# Altium PCB InterfaceOld.PcbDoc
Units mil, origin at the board's own origin, x right, y up, seen from the top; angles counter-clockwise.
Board outline 9900.03 x 4930.03 mil, 2 copper layers (Top Layer, Bottom Layer); 34 components, 85 nets, 292 pads, 55 vias.
Unrouted connection lines stored in the file: 116.
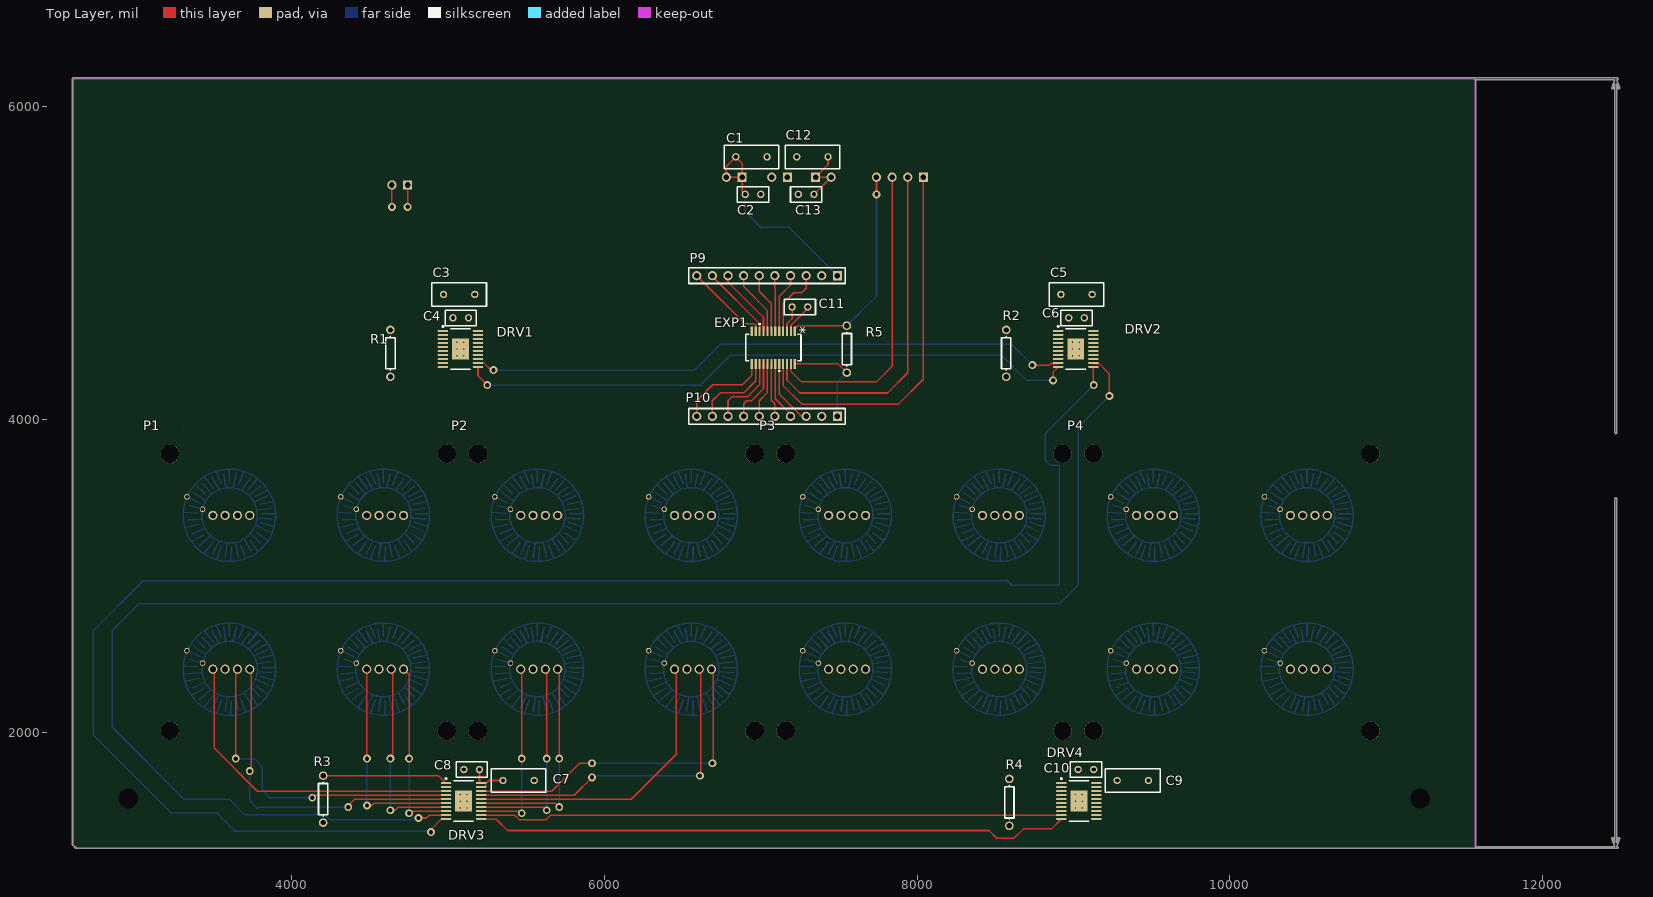
[diagram p0: Top Layer view]
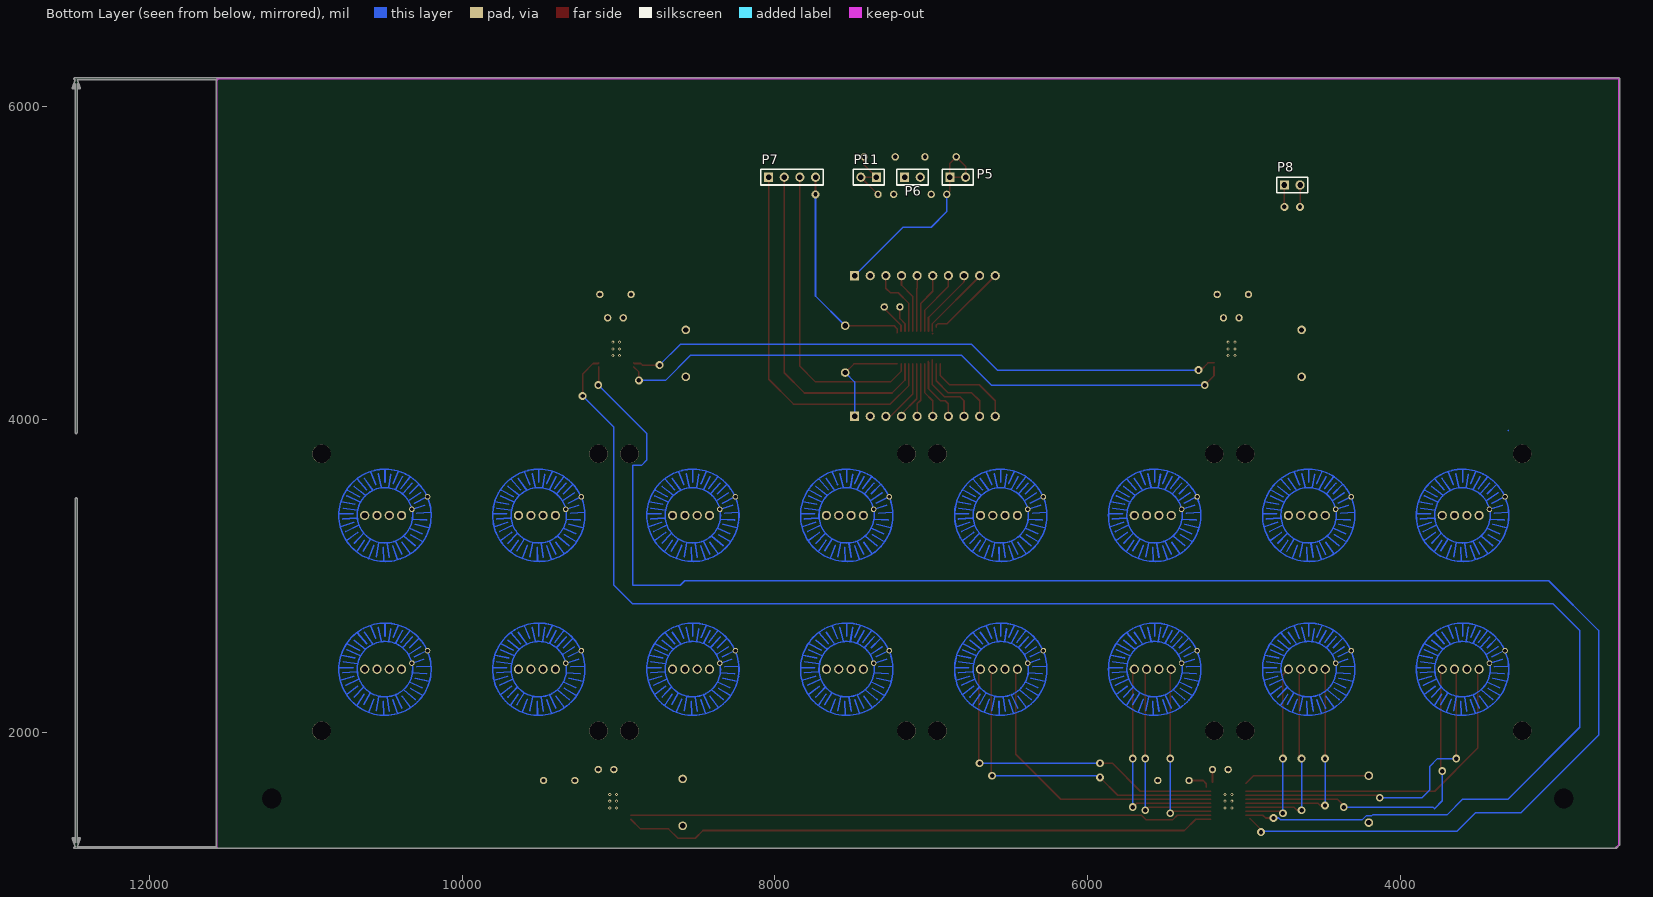
[diagram p1: Bottom Layer view, seen from below]

## Layer stack, top to bottom
Top Solder: solder mask 0.4, Solder Resist, Dk 3.5
Top Layer: signal copper 1.4
Dielectric 1: dielectric 12.6, FR-4, Dk 4.8
Bottom Layer: signal copper 1.4
Bottom Solder: solder mask 0.4, Solder Resist, Dk 3.5

## Board outline
2616.44,1256.47 ccw(c2620,1260) 2620,1254.98 11570,1254.98 ccw(c11570,1260) 11575,1259.61 ccw(c11580,1260) 11580,1254.98 12480,1254.98 ccw(c12480,1260) 12485.01,1260 ccw(c12480,1260) 12480,1265.02 12476.96,1265.02 12494.76,1318.41 ccw(c12490,1320) 12495.01,1320 ccw(c12490,1320) 12485.24,1321.59 12475.01,1290.9 12475.01,3493.06 ccw(c12470,3493.06) 12464.99,3493.06 12464.99,1290.9 12454.76,1321.59 ccw(c12450,1320) 12445.24,1318.41 12463.04,1265.02 11580,1265.02 ccw(c11580,1260) 11575.01,1260.55 11575.01,6170 ccw(c11570,6170) 11573.53,6173.56 11573.55,6173.55 11572.11,6174.98 12463.04,6174.98 12445.24,6121.59 ccw(c12450,6120) 12454.76,6118.41 12464.99,6149.1 12464.99,3914.94 ccw(c12470,3914.94) 12475.01,3914.94 12475.01,6149.1 12485.24,6118.41 ccw(c12490,6120) 12495.01,6120 ccw(c12490,6120) 12494.76,6121.59 12476.96,6174.98 12480,6174.98 ccw(c12480,6180) 12485.01,6180 ccw(c12480,6180) 12480,6185.02 2600,6185.02 ccw(c2600,6180) 2594.99,6180 2594.99,1280 ccw(c2600,1280) 2596.47,1276.44 2596.45,1276.45

## Design rules (kind name [scope] priority, off if disabled: settings)
Clearance [All] p1: gap=10 ignorepadtopadclearanceinfootprint=TRUE
ComponentClearance Buttons_Clearance [HasFootprint('BUTTONPAD-2X2') vs HasFootprint('BUTTONPAD-2X2')] p1: gap=0 collisioncheckmode=3 verticalgap=0 showdistances=FALSE
ComponentClearance [All] p2: gap=10 collisioncheckmode=3 verticalgap=10 showdistances=FALSE
PolygonConnect [All] p1: connectstyle=Relief reliefconductorwidth=10 reliefentries=4 polygonreliefangle="90 Angle" airgapwidth=10
RoutingVias [All] p1: holewidth=28 width=50 viastyle="Through Hole" minholewidth=28 minwidth=50 maxholewidth=28 maxwidth=50
SolderMaskExpansion [All] p1: expansion=4
Width [All] p1: maxlimit=15 minlimit=10 preferedwidth=10
29 further rules are at their usual default settings.

## Components (designator, comment, footprint, x,y, rotation, side; value= is the part's Value field where it differs from the comment)
C1 "" RAD-0.2 6940,5680 r0 top value=10uF
C2 "Cap" RAD-0.1 6950,5440 r180 top value=".01 uF"
C3 "" RAD-0.2 5070,4800 r180 top value=10uF
C4 "Cap" RAD-0.1 5080,4650 r0 top value=".01 uF"
C5 "" RAD-0.2 9020,4800 r180 top value=10uF
C6 "Cap" RAD-0.1 9020,4650 r0 top value=".01 uF"
C7 "" RAD-0.2 5450,1690 r0 top value=10uF
C8 "Cap" RAD-0.1 5150,1760 r0 top value=".01 uF"
C9 "" RAD-0.2 9380,1690 r0 top value=10uF
C10 "Cap" RAD-0.1 9080,1760 r0 top value=".01 uF"
C11 "Cap" RAD-0.1 7250,4720 r180 top value=".047 uF"
C12 "" RAD-0.2 7330,5680 r180 top value=10uF
C13 "Cap" RAD-0.1 7290,5440 r0 top value=".01 uF"
DRV1 "TLC5971PWPR" TI-PWP20-2965X2290TP_N 5078.11,4451.18 r0 top
DRV2 "TLC5971PWPR" TI-PWP20-2965X2290TP_N 9015.12,4451.18 r0 top
DRV3 "TLC5971PWPR" TI-PWP20-2965X2290TP_N 5098.11,1557.87 r0 top
DRV4 "TLC5971PWPR" TI-PWP20-2965X2290TP_N 9035.12,1557.87 r0 top
EXP1 "MAX7314AEGT" 21-0055H_24 7080,4460 r270 top
P1 "BUTTONPAD" BUTTONPAD-2X2 3120,1910 r0 top
P2 "BUTTONPAD" BUTTONPAD-2X2 5090,1910 r0 top
P3 "BUTTONPAD" BUTTONPAD-2X2 7060,1910 r0 top
P4 "BUTTONPAD" BUTTONPAD-2X2 9030,1910 r0 top
P5 "VCC" HDR1X2 6880,5550 r180 bottom
P6 "GND" HDR1X2 7170,5550 r180 bottom
P7 "I2C" HDR1X4 8040,5550 r180 bottom
P8 "SPI" HDR1X2 4740,5500 r180 bottom
P9 "2.2k_RES" HDR1X10 7490,4920 r180 top
P10 "2.2k_RES" HDR1X10 7490,4020 r180 top
P11 "12V" HDR1X2 7350,5550 r0 bottom
R1 "R1" AXIAL-0.3 4630,4423.17 r90 top value=2.5K
R2 "R2" AXIAL-0.3 8570,4423.17 r90 top value=2.5K
R3 "R3" AXIAL-0.3 4200,1570.67 r90 top value=2.5K
R4 "R4" AXIAL-0.3 8590,1550 r90 top value=2.5K
R5 "R5" AXIAL-0.3 7550,4450 r270 top value=1K

## Footprints (in the part's own frame and the unit in brackets; to place one, negate y for a bottom-side part, rotate by r counter-clockwise, add the part's x,y. Pads: shape width x height; smd on the part's side, far side on the other; paste and mask are expansions set on the pad)
21-0055H_24 [mil]
  rect 63x14 smd: 1(-104.5,137.5) 2(-104.5,112.5) 3(-104.5,87.5) 4(-104.5,62.5) 5(-104.5,37.5) 6(-104.5,12.5) 7(-104.5,-12.5) 8(-104.5,-37.5) 9(-104.5,-62.5) 10(-104.5,-87.5) 11(-104.5,-112.5) 12(-104.5,-137.5) 13(104.5,-137.5) 14(104.5,-112.5) 15(104.5,-87.5) 16(104.5,-62.5) 17(104.5,-37.5) 18(104.5,-12.5) 19(104.5,12.5) 20(104.5,37.5) 21(104.5,62.5) 22(104.5,87.5) 23(104.5,112.5) 24(104.5,137.5)
  silkscreen extent -156,-177 156,177
AXIAL-0.3 [mm] "Axial Device, Thru-Hole; 2 Leads; 0.3 in Pin Spacing"
  round 1.4 hole 0.85: 1(-3.81,0) 2(3.81,0)
  silkscreen extent -2.77,-0.76 2.77,0.76
BUTTONPAD-2X2 [mm]
  round 3 hole 3: 1(2.5,2.5) 1(2.5,47.5) 1(47.5,2.5) 1(47.5,47.5)
  round 1.5 hole 1: BLU1(15.5,37.5) BLU2(40.5,37.5) BLU3(15.5,12.5) BLU4(40.5,12.5) GRN1(13.5,37.5) GRN2(38.5,37.5) GRN3(13.5,12.5) GRN4(38.5,12.5) RED1(9.5,37.5) RED2(34.5,37.5) RED3(9.5,12.5) RED4(34.5,12.5) VCC1(11.5,37.5) VCC2(36.5,37.5) VCC3(11.5,12.5) VCC4(36.5,12.5)
  round 0.9 hole 0.6: SIG1(5.288,40.513) SIG2(7.828,38.481) SIG3(30.288,40.513) SIG4(32.828,38.481) SIG5(5.288,15.513) SIG6(7.828,13.481) SIG7(30.288,15.513) SIG8(32.828,13.481)
  Bottom Layer circle w0.254: c37.2,12.5 r7.5
  Bottom Layer circle w0.254: c12.2,12.5 r7.5
  Bottom Layer circle w0.254: c37.2,37.5 r7.5
  Bottom Layer circle w0.254: c12.2,37.5 r7.5
  Bottom Layer lines w0.254: 4.72,13.01 7.02,12.87 ; 4.72,38.01 7.02,37.87 ; 5.04,10.52 7.31,11.03 ; 5.04,35.52 7.31,36.03 ; 5.36,15.54 7.42,14.5 ; 5.36,40.54 7.42,39.5 ; 5.44,11.75 7.74,11.89 ; 5.44,36.75 7.74,36.89 ; 5.723,39.141 7.74,38.5 ; 5.728,14.139 7.74,13.5 ; 6.13,8.25 8.03,9.37 ; 6.13,33.25 8.03,34.37 ; 6.19,9.48 8.19,10.42 ; 6.19,34.48 8.19,35.42 ; 6.43,16.16 8.35,14.88 ; 6.43,41.16 8.35,39.88 ; 6.7,17.5 8.2,16 ; 6.7,42.5 8.2,41 ; 7.28,7.58 9.13,9.13 ; 7.28,32.58 9.13,34.13 ; 7.76,17.74 9.29,16.05 ; 7.76,42.74 9.29,41.05 ; 8.11,6.33 9.44,8.13 ; 8.11,31.33 9.44,33.13 ; 8.19,18.7 9.61,16.86 ; 8.19,43.7 9.61,41.86 ; 9.35,18.78 10.46,16.8 ; 9.35,43.78 10.46,41.8 ; 9.47,6.19 10.46,8.28 ; 9.47,31.19 10.46,33.28 ; 10.04,19.61 10.88,17.68 ; 10.04,44.61 10.88,42.68 ; 10.17,5.42 10.91,7.55 ; 10.17,30.42 10.91,32.55 ; 11.235,19.293 11.59,17.07 ; 11.249,44.208 11.59,42.07 ; 11.49,5.66 11.83,7.93 ; 11.49,30.66 11.83,32.93 ; 12.2,17.87 12.2,19.96 ; 12.2,42.87 12.2,44.96 ; 12.42,5.06 12.49,7.29 ; 12.42,30.06 12.49,32.29 ; 12.79,17.12 13.3,19.29 ; 12.79,42.12 13.3,44.29 ; 13.19,8.04 13.64,5.74 ; 13.19,33.04 13.64,30.74 ; 13.7,17.52 14.53,19.53 ; 13.7,42.52 14.53,44.53 ; 14.05,7.62 14.79,5.69 ; 14.05,32.62 14.79,30.69 ; 14.18,16.59 15.54,18.51 ; 14.18,41.59 15.54,43.51 ; 14.61,8.6 15.748,6.731 ; 14.61,33.6 15.748,31.75 ; 15.17,16.64 16.72,18.41 ; 15.17,41.64 16.72,43.41 ; 15.38,15.76 17.21,17.2 ; 15.38,40.76 17.21,42.2 ; 15.57,8.44 16.74,6.7 ; 15.57,33.44 16.74,31.7 ; 15.7,9.56 17.21,7.98 ; 15.7,34.56 17.21,32.98 ; 16.18,14.66 18.4,15.65 ; 16.18,39.66 18.4,40.65 ; 16.34,15.55 18.35,16.62 ; 16.34,40.55 18.35,41.62 ; 16.5,10.9 18.56,9.88 ; 16.5,35.9 18.56,34.88 ; 16.61,13.36 16.629,13.362 ; 16.61,38.36 16.629,38.363 ; 16.64,9.72 18.37,8.44 ; 16.64,34.72 18.37,33.44 ; 16.8,12.07 19.07,11.91 ; 16.8,37.07 19.07,36.91 ; 17.09,14.32 19.31,14.74 ; 17.09,39.32 19.31,39.74 ; 17.25,11.38 19.42,10.68 ; 17.25,36.38 19.42,35.68 ; 17.38,12.77 19.58,12.74 ; 17.38,37.77 19.58,37.74 ; 19.01,13.68 16.629,13.362 ; 19.01,38.68 16.629,38.363 ; 29.72,13.01 32.02,12.87 ; 29.72,38.01 32.02,37.87 ; 30.04,10.52 32.31,11.03 ; 30.04,35.52 32.31,36.03 ; 30.36,15.54 32.42,14.5 ; 30.36,40.54 32.42,39.5 ; 30.44,11.75 32.74,11.89 ; 30.44,36.75 32.74,36.89 ; 30.74,39.135 32.74,38.5 ; 30.898,14.085 32.74,13.5 ; 31.13,8.25 33.03,9.37 ; 31.13,33.25 33.03,34.37 ; 31.19,9.48 33.19,10.42 ; 31.19,34.48 33.19,35.42 ; 31.43,16.16 33.35,14.88 ; 31.43,41.16 33.35,39.88 ; 31.7,17.5 33.2,16 ; 31.7,42.5 33.2,41 ; 32.28,7.58 34.13,9.13 ; 32.28,32.58 34.13,34.13 ; 32.76,17.74 34.29,16.05 ; 32.76,42.74 34.29,41.05 ; 33.11,6.33 34.44,8.13 ; 33.11,31.33 34.44,33.13 ; 33.19,18.7 34.61,16.86 ; 33.19,43.7 34.61,41.86 ; 34.35,18.78 35.46,16.8 ; 34.35,43.78 35.46,41.8 ; 34.47,6.19 35.46,8.28 ; 34.47,31.19 35.46,33.28 ; 35.04,19.61 35.88,17.68 ; 35.04,44.61 35.88,42.68 ; 35.17,5.42 35.91,7.55 ; 35.17,30.42 35.91,32.55 ; 36.249,44.205 36.59,42.07 ; 36.275,19.043 36.59,17.07 ; 36.49,5.66 36.83,7.93 ; 36.49,30.66 36.83,32.93 ; 37.2,17.87 37.2,19.96 ; 37.2,42.87 37.2,44.96 ; 37.42,5.06 37.49,7.29 ; 37.42,30.06 37.49,32.29 ; 37.79,17.12 38.3,19.29 ; 37.79,42.12 38.3,44.29 ; 38.19,8.04 38.64,5.74 ; 38.19,33.04 38.64,30.74 ; 38.7,17.52 39.53,19.53 ; 38.7,42.52 39.53,44.53 ; 39.05,7.62 39.79,5.69 ; 39.05,32.62 39.79,30.69 ; 39.18,16.59 40.54,18.51 ; 39.18,41.59 40.54,43.51 ; 39.61,8.6 40.662,6.797 ; 39.61,33.6 40.732,31.677 ; 40.17,16.64 41.72,18.41 ; 40.17,41.64 41.72,43.41 ; 40.38,15.76 42.21,17.2 ; 40.38,40.76 42.21,42.2 ; 40.57,8.44 41.74,6.7 ; 40.57,33.44 41.74,31.7 ; 40.7,9.56 42.21,7.98 ; 40.7,34.56 42.21,32.98 ; 41.18,14.66 43.4,15.65 ; 41.18,39.66 43.4,40.65 ; 41.34,15.55 43.35,16.62 ; 41.34,40.55 43.35,41.62 ; 41.5,10.9 43.56,9.88 ; 41.5,35.9 43.56,34.88 ; 41.61,13.36 41.629,13.362 ; 41.61,38.36 41.629,38.363 ; 41.64,9.72 43.37,8.44 ; 41.64,34.72 43.37,33.44 ; 41.8,12.07 44.07,11.91 ; 41.8,37.07 44.07,36.91 ; 42.09,14.32 44.31,14.74 ; 42.09,39.32 44.31,39.74 ; 42.25,11.38 44.42,10.68 ; 42.25,36.38 44.42,35.68 ; 42.38,12.77 44.58,12.74 ; 42.38,37.77 44.58,37.74 ; 44.01,13.68 41.629,13.362 ; 44.01,38.68 41.629,38.363 ; 16.629,13.362 ccw(c12.21,12.51) 12.21,8.01 ccw(c12.21,12.51) 16.629,13.362 ; 16.629,38.363 ccw(c12.21,37.51) 12.21,33.01 ccw(c12.21,37.51) 16.629,38.363 ; 41.629,13.362 ccw(c37.21,12.51) 37.21,8.01 ccw(c37.21,12.51) 41.629,13.362 ; 41.629,38.363 ccw(c37.21,37.51) 37.21,33.01 ccw(c37.21,37.51) 41.629,38.363
HDR1X2 [mm] "Connector; Header; 2 Position"
  rect 1.5x1.5 hole 0.9: 1(0,0)
  round 1.5 hole 0.9: 2(2.54,0)
  silkscreen extent -1.27,-1.27 3.81,1.27
HDR1X4 [mm] "Connector; Header; 4 Position"
  rect 1.5x1.5 hole 0.9: 1(0,0)
  round 1.5 hole 0.9: 2(2.54,0) 3(5.08,0) 4(7.62,0)
  silkscreen extent -1.27,-1.27 8.89,1.27
HDR1X10 [mm] "Connector; Header; 10 Position"
  rect 1.5x1.5 hole 0.9: 1(0,0)
  round 1.5 hole 0.9: 2(2.54,0) 3(5.08,0) 4(7.62,0) 5(10.16,0) 6(12.7,0) 7(15.24,0) 8(17.78,0) 9(20.32,0) 10(22.86,0)
  silkscreen extent -1.27,-1.27 24.13,1.27
RAD-0.1 [mm] "Radial Cap, Thru-Hole; 2 Leads; 0.1 in Pin Spacing"
  round 1.2 hole 0.7: 1(-1.27,0) 2(1.27,0)
  silkscreen extent -2.54,-1.27 2.54,1.27
RAD-0.2 [mm] "Radial Cap, Thru-Hole; 2 Leads; 0.2 in Pin Spacing"
  round 1.2 hole 0.7: 1(-2.54,0) 2(2.54,0)
  silkscreen extent -4.44,-1.91 4.44,1.91
TI-PWP20-2965X2290TP_N [mm] "SOP, 20-Leads, Body 6.5x4.4mm, Pitch 0.65mm, Thermal Pad 2.965x2.29mm, IPC Medium Density"
  oval 1.7x0.35 smd: 1(-2.85,2.925) 2(-2.85,2.275) 3(-2.85,1.625) 4(-2.85,0.975) 5(-2.85,0.325) 6(-2.85,-0.325) 7(-2.85,-0.975) 8(-2.85,-1.625) 9(-2.85,-2.275) 10(-2.85,-2.925) 11(2.85,-2.925) 12(2.85,-2.275) 13(2.85,-1.625) 14(2.85,-0.975) 15(2.85,-0.325) 16(2.85,0.325) 17(2.85,0.975) 18(2.85,1.625) 19(2.85,2.275) 20(2.85,2.925)
  rect 2.75x3.43 smd: 21(0,0)
  silkscreen extent -2.97,-3.3 1.6,3.77, body extent -2.25,-3.3 2.25,3.3, height 1.2

## Part data
C1 C3 C5 C7 C9 C12: library part "Cap Pol2", "Polarized Capacitor (Axial)", LatestRevisionDate=17-Jul-2002, LatestRevisionNote="Re-released for DXP Platform.", PackageDescription="Polarized Capacitor; 2 Leads", PackageReference=POLAR0.8, Published=8-Jun-2000, Publisher="Altium Limited"
C2 C4 C6 C8 C10 C11 C13: "Capacitor", LatestRevisionDate=17-Jul-2002, LatestRevisionNote="Re-released for DXP Platform.", PackageDescription="Radial Cap, Thru-Hole; 2 Leads; 0.3 in Pin Spacing", PackageReference=RAD-0.3, Published=8-Jun-2000, Publisher="Altium Limited"
DRV1 DRV2 DRV3 DRV4: "12-Channel, 16-Bit ES-PWM RGB LED Driver with 3.3 V Linear Regulator, 6 to 17 V, -40 to 85 degC, 20-pin SOP (PWP20), Green (RoHS & no Sb/Br)", Manufacturer="Texas Instruments", Rating=Catalog, Supplier Part Number 1=296-27796-2-ND, Code_JEDEC=MO-153, ComponentLink1Description="Manufacturer URL", ComponentLink1URL=http://www.ti.com/, ComponentLink2Description=Datasheet, ComponentLink2URL=http://www.ti.com/general/docs/lit/getliterature.tsp?genericPartNumber=TLC5971&fileType=pdf, ComponentLink3Description="Package Specification", ComponentLink3URL=http://www.ti.com/litv/pdf/mhts001g, DatasheetVersion=SBVS146C, Eco-Plan="Green (RoHS & no Sb/Br)", Mounting Technology="Surface Mount", PackageDescription="20-Lead, Plastic Small Outline, Body Size 4.4 x 6.5 mm, Pitch 0.65 mm", PackageReference=PWP20-2965X2290TP, PackageVersion=4073225-4/I, PartNumber=TLC5971PWPR, SubFamily="LED Driver", Supplier 1=Digi-Key, Supplier 2=Digi-Key, Supplier 3=Digi-Key, Supplier 4=Newark, Supplier 5=Mouser, Supplier Part Number 2=296-27796-1-ND, Supplier Part Number 3=296-27796-6-ND, Supplier Part Number 4=01T0730, Supplier Part Number 5=595-TLC5971PWPR, Vin(Max)(V)=17, Vin(Min)(V)=6
EXP1: "Interface IC - I/O extensions Maxim Integrated MAX7314AEG%2B PWM I%C2%B2C 400 kHz QSOP 24", Package="QSOP-24 Maxim Integrated", Availability=Bad, MF="Maxim Integrated", MP=MAX7314AEG+, Price="2.82 USD"
P1 P2 P3 P4: library part BUTTONPAD-2X2, "5mm Button PadProven layout and schematic for 2x2 button pad. Panelize this device/fp to a 4x4 pad if needed. Spark Fun Electronics SKU : COM-07835. Compatible common cathode tri-color LED SKU : COM-00105"
P5 P6 P8 P11: library part "Header 2", "Header, 2-Pin", LatestRevisionDate=17-Jul-2002, LatestRevisionNote="Re-released for DXP Platform.", Publisher="Altium Limited"
P7: library part "Header 4", "Header, 4-Pin", LatestRevisionDate=17-Jul-2002, LatestRevisionNote="Re-released for DXP Platform.", Publisher="Altium Limited"
P9 P10: library part "Header 10", "Header, 10-Pin", LatestRevisionDate=17-Jul-2002, LatestRevisionNote="Re-released for DXP Platform.", Publisher="Altium Limited"
R1 R2 R3 R4 R5: library part Res1, "Resistor", LatestRevisionDate=17-Jul-2002, LatestRevisionNote="Re-released for DXP Platform.", PackageDescription="Axial Device, Thru-Hole; 2 Leads; 0.3 in Pin Spacing", PackageReference=AXIAL-0.3, Published=8-Jun-2000, Publisher="Altium Limited"

## Free pads (board coordinates)
  round 60 hole 125: 1(11220.47,6299.21) 5(11220.47,1574.8) 6(2952.76,1574.8) 7(2952.76,6299.21)

## Via types
v1: diameter 50, hole 28, Top Layer to Bottom Layer, 31 vias
v2: diameter 19.68, hole 7.87, Top Layer to Bottom Layer, 24 vias

## Nets (pads, with @x,y where several pads share a name; then routed paths per layer and width w, separated by ;. In a path a pad name is that pad's centre, name@x,y a point inside that pad or via, vN(x,y) a via of type N, cw(c..) or ccw(c..) an arc to the next point about the centre after c; other vN are vias at no path point)
1.27V: 
3.3V: C1.1 C2.2 C3.1 C4.2 C5.1 C6.2 C7.1 C8.2 C9.1 C10.2 C11.1 DRV1.19 DRV1.20 DRV2.19 DRV2.20 DRV3.19 DRV3.20 DRV4.19 DRV4.20 EXP1.2 EXP1.24 P5.1 P5.2 P9.1 P10.1 R5.2 | length 2480.7
  Top Layer w10: 5200,1680 C8.2 ; DRV3.19@5240,1647.5 5240,1670 5260,1690 C7.1 ; C2.2 6880,5460 P5.1 ; EXP1.2 7193,4565 7193,4603.25 7300,4710.25 C11.1 ; EXP1.24 7494.5,4355.5 R5.2 ; P9.1@7490,4900 P9.1@7490,4910 ; P5.1 P5.2 6780,5620 C1.1 6880,5640 P5.1
  Bottom Layer w10: C2.2 6900,5330 7000,5230 7180,5230 P9.1 ; P10.1 7490,4240 R5.2
12V: C12.1 C13.2 P11.1 P11.2 | length 418.7
  Top Layer w10: C13.2 P11.2 P11.1 7430,5630 C12.1
BLU1: DRV1.5 P1.BLU1
BLU2: DRV1.8 P1.BLU2
BLU3: DRV1.15 P2.BLU1
BLU4: DRV1.18 P2.BLU2
BLU5: DRV2.5 P3.BLU1
BLU6: DRV2.8 P3.BLU2
BLU7: DRV2.15 P4.BLU1
BLU8: DRV2.18 P4.BLU2
BLU9: DRV3.5 P1.BLU3 | length 2168.1
  Top Layer w10: v1(3730,1750) 3740.24,1760.24 P1.BLU3@3740.24,2402.13 ; v1(4360,1520) 4350,1520 4400.67,1570.67 DRV3.5
  Bottom Layer w10: v1(3730,1750) 3730,1560 3780,1510 3790,1520 v1(4360,1520)
BLU10: DRV3.8 P1.BLU4 | length 1198.5
  Top Layer w10: P1.BLU4 4750,2366.62 v1(4750,1830) ; v1(4750,1480) 4740,1480 4753.9,1493.9 DRV3.8
  Bottom Layer w10: v1(4750,1480) v1(4750,1830)
BLU11: DRV3.15 P2.BLU3 | length 1372.3
  Top Layer w10: DRV3.15 5684.92,1545.08 v1(5710,1520) ; v1(5710,1830) 5710,2401.89 P2.BLU3@5710.24,2402.13
  Bottom Layer w10: v1@5710,1540 v1(5710,1830)
BLU12: DRV3.18 P2.BLU4 | length 2137.5
  Top Layer w10: DRV3.18 5661.85,1621.85 5840,1800 v1(5920,1800) ; v1@6690,1810 6694.49,1814.49 P2.BLU4@6694.49,2402.13
  Bottom Layer w10: v1@5930,1800 v1(6690,1800)
BLU13: DRV4.5 P3.BLU3
BLU14: DRV4.8 P3.BLU4
BLU15: DRV4.15 P4.BLU3
BLU16: DRV4.18 P4.BLU4
"EXTRA IN": EXP1.21 P7.1 | length 2443.3
  Top Layer w10: EXP1.21 7142.5,4217.5 7261.42,4098.58 7881.42,4098.58 8040,4257.16 P7.1
GND: C1.2 C2.1 C3.2 C4.1 C5.2 C6.1 C7.2 C8.1 C9.2 C10.1 C11.2 C12.2 C13.1 DRV1.2 DRV1.21 DRV2.2 DRV2.21 DRV3.2 DRV3.21 DRV4.2 DRV4.21 EXP1.3 EXP1.12 P1.SIG1 P1.SIG3 P1.SIG5 P1.SIG7 P2.SIG1 P2.SIG3 P2.SIG5 P2.SIG7 P3.SIG1 P3.SIG3 P3.SIG5 P3.SIG7 P4.SIG1 P4.SIG3 P4.SIG5 P4.SIG7 P6.1 P6.2 R1.1 R2.1 R3.1 R4.1 | length 169
  Top Layer w10: EXP1.3 7167.5,4613.1 7200,4645.61 C11.2
  other v2: 5076.46,1514.57 5119.76,1514.57 9013.46,1514.57 9056.77,1514.57 5076.46,1557.87 5119.76,1557.87 9013.46,1557.87 9056.77,1557.87 5076.46,1601.18 5119.76,1601.18 9013.46,1601.18 9056.77,1601.18 5056.46,4407.87 5099.76,4407.87 8993.46,4407.87 9036.77,4407.87 5056.46,4451.18 5099.76,4451.18 8993.46,4451.18 9036.77,4451.18 5056.46,4494.49 5099.76,4494.49 8993.46,4494.49 9036.77,4494.49
GRN1: DRV1.4 P1.GRN1
GRN2: DRV1.7 P1.GRN2
GRN3: DRV1.14 P2.GRN1
GRN4: DRV1.17 P2.GRN2
GRN5: DRV2.4 P3.GRN1
GRN6: DRV2.7 P3.GRN2
GRN7: DRV2.14 P4.GRN1
GRN8: DRV2.17 P4.GRN2
GRN9: DRV3.4 P1.GRN3 | length 2116.2
  Top Layer w10: v1(3640,1830) P1.GRN3@3640,2402.13 ; v1(4130,1580) 4146.26,1596.26 DRV3.4
  Bottom Layer w10: v1(3640,1830) 3760,1830 3810,1780 3810,1630 3860,1580 v1(4130,1580)
GRN10: DRV3.7 P1.GRN4 | length 1279.8
  Top Layer w10: v1(4630,1500) 4660,1500 4680,1520 4985.39,1520 DRV3.7 ; v1(4630,1830) 4641.5,1830 4645.75,1834.25 P1.GRN4@4645.75,2402.13
  Bottom Layer w10: v1(4630,1500) v1(4630,1830)
GRN11: DRV3.14 P2.GRN3 | length 1330.9
  Top Layer w10: DRV3.14 5210.83,1520 5610,1520 v1(5630,1500) ; v1(5630,1830) 5630,2400.63 P2.GRN3@5631.5,2402.13
  Bottom Layer w10: v1(5630,1500) v1(5630,1830)
GRN12: DRV3.17 P2.GRN4 | length 2135.5
  Top Layer w10: DRV3.17 5806.26,1596.26 v1(5920,1710) ; v1(6610,1720) 6615.75,1725.75 P2.GRN4@6615.75,2402.13
  Bottom Layer w10: v1(5920,1710) 5930,1720 v1(6610,1720)
GRN13: DRV4.4 P3.GRN3
GRN14: DRV4.7 P3.GRN4
GRN15: DRV4.14 P4.GRN3
GRN16: DRV4.17 P4.GRN4
INTERRUPT: EXP1.1 P7.4 R5.1 | length 1396.3
  Top Layer w10: EXP1.1@7217,4553.65 7218,4554.65 7218,4581 7237,4600 R5.1 ; v1(7740,5440) P7.4
  Bottom Layer w10: R5.1 7740,4790 v1(7740,5440)
MOSI: DRV1.9 P8.2 | length 140
  Top Layer w10: v1(4640,5360) P8.2
NetDRV1_1: DRV1.1 R1.2
NetDRV2_1: DRV2.1 R2.2
NetDRV3_1: DRV3.1 R3.2 | length 805.6
  Top Layer w10: R3.2 4938.27,1720.67 DRV3.1
NetDRV4_1: DRV4.1 R4.2
NetU1_42: 
RED1: DRV1.3 P1.RED1
RED2: DRV1.6 P1.RED2
RED3: DRV1.13 P2.RED1
RED4: DRV1.16 P2.RED2
RED5: DRV2.3 P3.RED1
RED6: DRV2.6 P3.RED2
RED7: DRV2.13 P4.RED1
RED8: DRV2.16 P4.RED2
RED9: DRV3.3 P1.RED3 | length 2101.6
  Top Layer w10: P1.RED3@3504.02,2402.13 3504.02,1895.98 3778.15,1621.85 DRV3.3
RED10: DRV3.6 P1.RED4 | length 1374.3
  Top Layer w10: v1@4478.27,1840 P1.RED4 ; v1(4480,1530) 4510,1530 4525.08,1545.08 DRV3.6
  Bottom Layer w10: v1(4480,1530) v1(4480,1830)
RED11: DRV3.13 P2.RED3 | length 1189.2
  Top Layer w10: DRV3.13 5456.1,1493.9 v1(5470,1480) ; v1(5470,1830) 5470,2398.11 P2.RED3@5474.02,2402.13
  Bottom Layer w10: v1(5470,1480) v1(5470,1830)
RED12: DRV3.16 P2.RED4 | length 1910.9
  Top Layer w10: DRV3.16 6170.67,1570.67 6458.27,1858.27 P2.RED4@6458.27,2402.13
RED13: DRV4.3 P3.RED3
RED14: DRV4.6 P3.RED4
RED15: DRV4.13 P4.RED3
RED16: DRV4.16 P4.RED4
SCKO1: DRV1.11 DRV2.10 | length 4017.2
  Top Layer w10: DRV1.11 5190.31,4279.69 v1(5250,4220) ; v1(8870,4250) 8870,4303.11 DRV2.10
  Bottom Layer w10: v1(5250,4220) 6615.59,4220 6807.8,4412.2 8537.8,4412.2 8700,4250 v1(8870,4250) v1@8880,4250
SCKO2: DRV2.11 DRV3.10 | length 11123.6
  Top Layer w10: v1(4890,1360) 4890,1376.42 DRV3.10@4960,1446.42 ; DRV2.11 9127.32,4222.68 v1(9130,4220)
  Bottom Layer w10: v1@4890,1376.42 4878.58,1365 3635,1365 3515,1485 3225,1485 2729.79,1980.21 2729.79,2649.79 3048.3,2968.3 8577.05,2968.3 8605.36,2940 8909.79,2940 8909.79,3705.64 8909.41,3706.03 8853.98,3706.03 8820,3740 8820,3910 v1(9130,4220)
SCKO3: DRV3.11 DRV4.10 | length 3814.3
  Top Layer w10: DRV3.11 5307.28,1442.72 5380,1370 8460,1370 8510,1320 8620,1320 8680,1380 8860.2,1380 DRV4.10
SCL: EXP1.22 P7.2 | length 2214.9
  Top Layer w10: EXP1.22 7167.5,4252.5 7250.71,4169.29 7810.71,4169.29 7940,4298.58 P7.2
SDA: EXP1.23 P7.3 | length 1974.9
  Top Layer w10: EXP1.23 7192.5,4307.5 7260,4240 7740,4240 7840,4340 P7.3
SDTO1: DRV1.12 DRV2.9 | length 3860.2
  Top Layer w10: DRV1.12 5228.78,4361.61 5274.8,4315.59 v1(5290,4315.59) ; v1(8737.8,4347.8) 8847.03,4347.8 8857.15,4357.91 8899.21,4357.91 DRV2.9
  Bottom Layer w10: v1(5290,4315.59) 6575.59,4315.59 6740,4480 8605.59,4480 v1(8737.8,4347.8)
SDTO2: DRV2.12 DRV3.9 | length 10877.7
  Top Layer w10: v1(4810,1450) 4860,1450 4878.31,1468.31 DRV3.9 ; DRV2.12 9131.02,4357.91 9162.96,4357.91 9230,4290.88 v1(9230,4150)
  Bottom Layer w10: v1(4810,1450) 4776.57,1450 4766.57,1440 4240.86,1440 4217.63,1463.23 4182.37,1463.23 4175.6,1470 3700,1470 3600,1570 3310,1570 2850,2030 2850,2649.79 3020,2819.79 8909.79,2819.79 9030,2940 9030,3950 v1(9230,4150)
SDTO3: DRV3.12 DRV4.9 | length 3736.1
  Top Layer w10: DRV3.12 5425.12,1468.31 5453.43,1440 5626.57,1440 5654.88,1468.31 DRV4.9
SPCK: DRV1.10 P8.1 | length 140
  Top Layer w10: v1(4740,5360) P8.1
SW1: EXP1.4 P1.SIG2 P9.3 | length 435.9
  Top Layer w10: EXP1.4 7142.5,4742.5 7210,4810 7260,4810 7290,4840 P9.3@7290,4910
SW2: EXP1.5 P1.SIG4 P9.4 | length 375.5
  Top Layer w10: EXP1.5 7117.5,4787.5 7190,4860 P9.4@7190,4910
SW3: EXP1.6 P2.SIG2 P9.5 | length 346.5
  Top Layer w10: P9.5@7090,4910 7090,4840 7092.5,4837.5 EXP1.6
SW4: EXP1.7 P2.SIG4 P9.6 | length 377.6
  Top Layer w10: P9.6@6990,4910 6990,4820 7067.5,4742.5 EXP1.7
SW5: EXP1.8 P3.SIG2 P9.7 | length 409.4
  Top Layer w10: P9.7@6890,4910 6890,4850 7042.5,4697.5 EXP1.8 EXP1.8@7042,4565
SW6: EXP1.9 P3.SIG4 P9.8 | length 439.5
  Top Layer w10: P9.8@6790,4910 6790,4880 7017,4653 EXP1.9@7017,4564.5
SW7: EXP1.10 P4.SIG2 P9.9 | length 478.6
  Top Layer w10: P9.9@6690,4910 6695.6,4910 6992,4613.6 6992,4564.5 EXP1.10 ; EXP1.10@6989.5,4550.5 EXP1.10@6992.5,4547.5
SW8: EXP1.11 P4.SIG4 P9.10 | length 517.3
  Top Layer w10: P9.10@6590,4910 6600,4910 6896.5,4613.5 6956.75,4613.5 6967,4603.25 EXP1.11@6967,4590
SW9: EXP1.13 P1.SIG6 P10.10 | length 593.7
  Top Layer w10: P10.10 6590,4120 6692,4222 6882,4222 6942,4282 EXP1.13@6942,4355.5
  Bottom Layer w10: 3307.68,3929.77 3308.43,3929.02
SW10: EXP1.14 P1.SIG8 P10.9 | length 538.1
  Top Layer w10: P10.9 6690,4120 6740,4170 6890,4170 6967,4247 EXP1.14@6967,4355.5
SW11: EXP1.15 P2.SIG6 P10.8 | length 505.7
  Top Layer w10: P10.8 6790,4120 6815,4145 6915,4145 6992,4222 6992,4375.71 6993,4376.71 EXP1.15@6993,4383.03
SW12: EXP1.16 P2.SIG8 P10.7 | length 423.3
  Top Layer w10: P10.7 6890,4100 6910,4120 6940,4120 7017,4197 7017,4365.36 7018,4366.36 EXP1.16@7018,4372.68
SW13: EXP1.17 P3.SIG6 P10.6 | length 357.2
  Top Layer w10: P10.6 6990,4120 7042,4172 7042,4355 EXP1.17
SW14: EXP1.18 P3.SIG8 P10.5 | length 344.8
  Top Layer w10: EXP1.18 7067.5,4122.5 7090,4100 P10.5
SW15: EXP1.19 P4.SIG6 P10.4 | length 375.9
  Top Layer w10: EXP1.19 7092.5,4132.86 7190,4035.35 P10.4
SW16: EXP1.20 P4.SIG8 P10.3 | length 424.5
  Top Layer w10: EXP1.20 7117.5,4162.5 7260,4020 P10.3
pads on no net: DRV4.11 DRV4.12 P1.1 P1.VCC1 P1.VCC2 P1.VCC3 P1.VCC4 P2.1 P2.VCC1 P2.VCC2 P2.VCC3 P2.VCC4 P3.1 P3.VCC1 P3.VCC2 P3.VCC3 P3.VCC4 P4.1 P4.VCC1 P4.VCC2 P4.VCC3 P4.VCC4 P9.2 P10.2

## Keep-outs
Keep-Out Layer:
  lines w10: 2620,1260 2600,1280 2600,6180 ; 11540,6180 2600,6180 ; 11560,6180 11570,6170 11570,1260 ; 11570,6180 2600,6180

## Dimensions
11540,6180 to 11570,1254.98 on Keep-Out Layer

## Text inside footprints (layer, text, board x,y; h text height)
EXP1: Top Overlay "*" at 7216.42,4597.24 h73.82 r270; Mechanical 1 "*" at 7189.26,4546.07 h73.82 r270
P1: Mechanical 2 "C4" at 4566.85,2471.02 h62; Mechanical 2 "C3" at 3582.6,2480.87 h62; Mechanical 2 "C2" at 4566.85,3465.12 h62; Mechanical 2 "C1" at 3582.6,3465.12 h62
P2: Mechanical 2 "C1" at 5552.6,3465.12 h62; Mechanical 2 "C2" at 6536.85,3465.12 h62; Mechanical 2 "C3" at 5552.6,2480.87 h62; Mechanical 2 "C4" at 6536.85,2471.02 h62
P3: Mechanical 2 "C4" at 8506.85,2471.02 h62; Mechanical 2 "C3" at 7522.6,2480.87 h62; Mechanical 2 "C2" at 8506.85,3465.12 h62; Mechanical 2 "C1" at 7522.6,3465.12 h62
P4: Mechanical 2 "C1" at 9492.6,3465.12 h62; Mechanical 2 "C2" at 10476.85,3465.12 h62; Mechanical 2 "C3" at 9492.6,2480.87 h62; Mechanical 2 "C4" at 10476.85,2471.02 h62